# Altium PCB meteostancia_TX.PcbDoc
Units mm, origin at the board's own origin, x right, y up, seen from the top; angles counter-clockwise.
Board outline 44.5 x 32.75 mm, 2 copper layers (Top Layer, Bottom Side), stack 1.536 mm thick; 13 components, 11 nets, 67 pads, 0 vias.
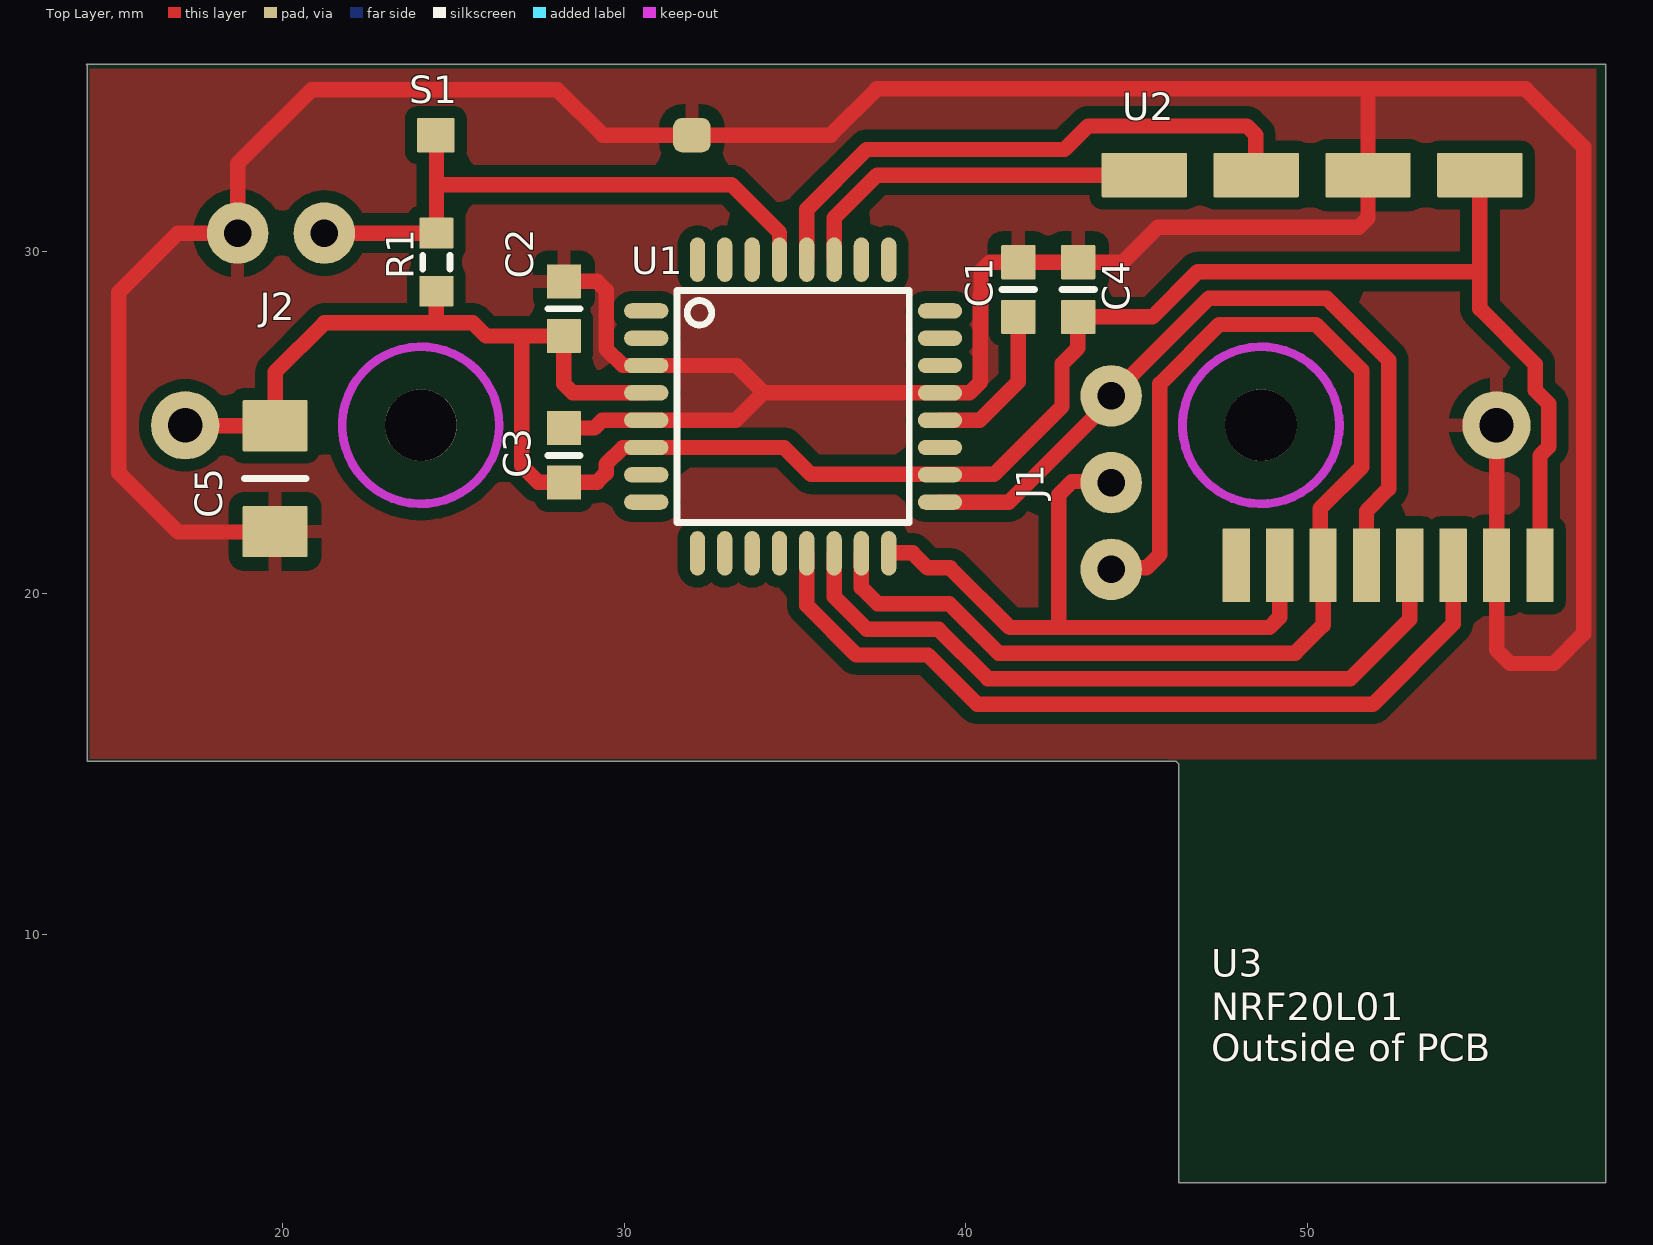
[diagram p0: Top Layer view]
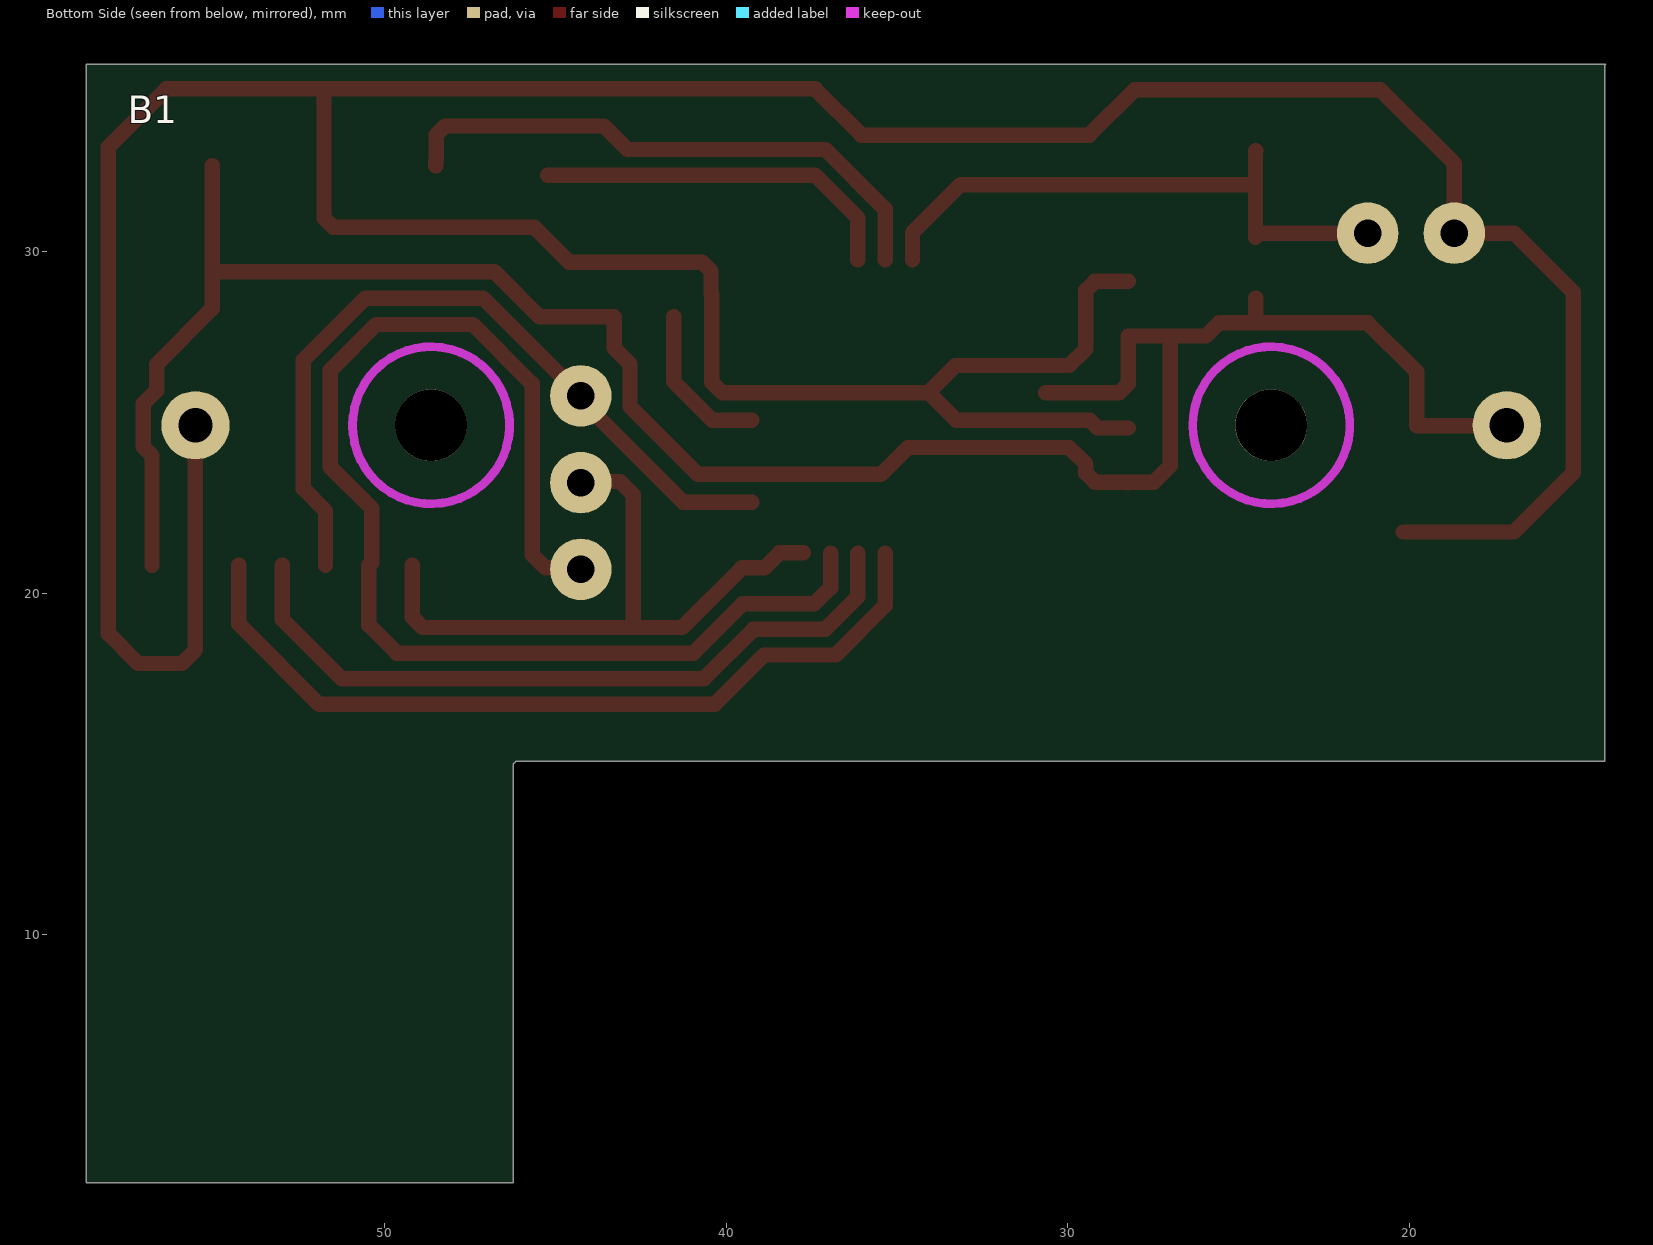
[diagram p1: Bottom Side view, seen from below]
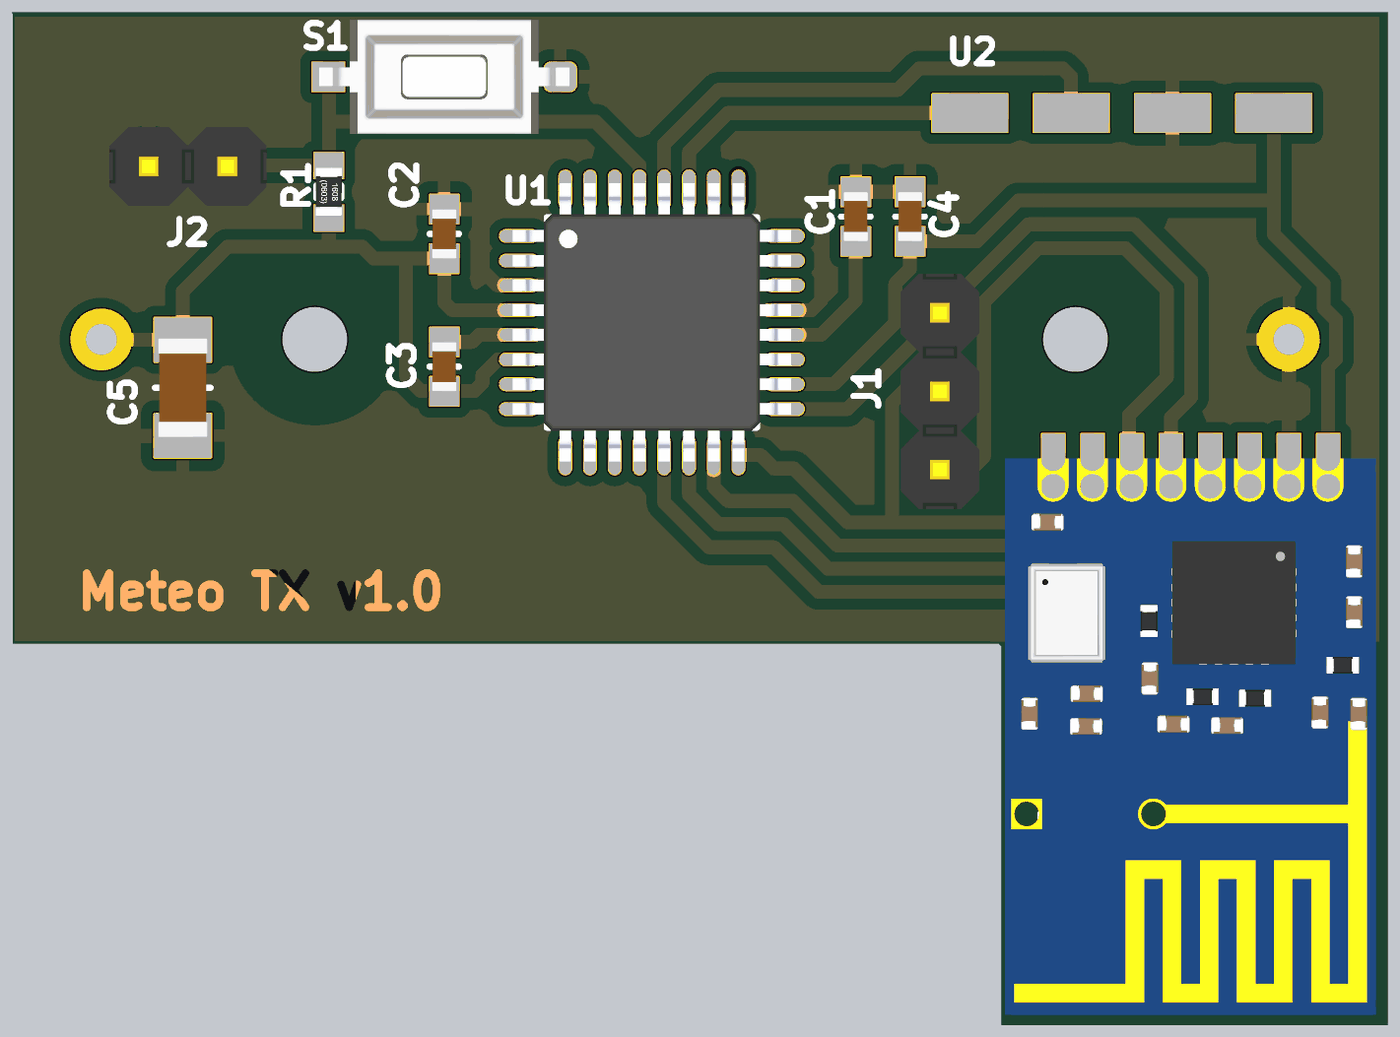
[diagram p2: 3D render of the assembled board from above, using the file's embedded part models]

## Layer stack, top to bottom
Top Solder: solder mask 0.0254, SM-003, Dk 4
Top Layer: signal copper 0.0356
Dielectric 1: dielectric 1.5, FR-4, Dk 4.8
Bottom Side: signal copper (thickness not stored)

## Board outline
14.285,15.09 14.285,35.465 14.25,35.5 58.75,35.5 58.75,2.75 46.25,2.75 46.25,15 46.16,15.09

## Design rules (kind name [scope] priority, off if disabled: settings)
AcuteAngle [All] p1 off: minimum=6.00000000000000E+0001 checktracksonly=FALSE
AssemblyTestPointUsage [All] p1 off:
AssemblyTestpoint [All] p1 off: testpointundercomponent=TRUE minsize=1.016 maxsize=2.54 preferedsize=1.524 minholesize=0 maxholesize=1.016 preferedholesize=0.813 testpointgrid=0.025 usegrid=TRUE gridtolerance=0 allowsidetop=TRUE allowsidebottom=TRUE
BoardOutlineClearance [All] p1: gap=0.25 ignorepadtopadclearanceinfootprint=FALSE // Отступ от края ПП при скрайбировании
Clearance "Opt Mounting Holes Clearance bottom" [IsPad and (Name = 'Free-OPT_MH') vs OnBottomLayer or OnMultiLayer] p1: gap=2 ignorepadtopadclearanceinfootprint=FALSE // Зазор крепежных отверстий
Clearance "Mounting Holes Clearance" [IsPad and (not PadIsPlated) and OnMultiLayer and not InAnyComponent and not (Name = 'Free-OPT_MH')] p2: gap=2.9 ignorepadtopadclearanceinfootprint=FALSE // Зазор крепежных отверстий
Clearance "Unplated pad Clearance" [IsPad and OnMultiLayer and (not PadIsPlated)] p3: gap=0.3 ignorepadtopadclearanceinfootprint=FALSE // Отступ меди от неметаллизированного отверстия
Clearance "Poly Clearance" [InNetClass('PWR') and not InAnyComponent] p4: gap=0.35 ignorepadtopadclearanceinfootprint=FALSE // Зазор полигон-всё по Резониту
Clearance "Class 4 Clearance" [All] p5: gap=0.3 ignorepadtopadclearanceinfootprint=FALSE except(0.35: Arc-Fill Arc-Poly Arc-Region Track-Fill Track-Poly Track-Region SMDPad-Fill SMDPad-Poly SMDPad-Region THPad-Fill THPad-Poly THPad-Region Via-Fill Via-Poly Via-Region Fill-Fill Fill-Poly Fill-Region Poly-Poly Poly-Region Region-Region) // Технологическое правило 4 класс точности ПП
ComponentClearance ComponentClearance_1 [All] p1: gap=0.254 collisioncheckmode=3 verticalgap=0.254 showdistances=FALSE
ComponentClearance ComponentClearance_141V [(ObjectKind = 'Component') And (Comment Like '141V*') vs (ObjectKind = 'Component') And (Comment Like '141V*')] p2: gap=-0.5 collisioncheckmode=3 verticalgap=0.254 showdistances=FALSE // Для разъемов 141V
ComponentClearance [InComponent('ISP1')] p3: gap=0.05 collisioncheckmode=3 verticalgap=0.1 showdistances=FALSE
ComponentOrientations [All] p1: allowedrotations=27
DiffPairsRouting [All] p1: maxlimit=0.15 minlimit=0.15 mostfreqgap=0.15 toplayer_minwidth=0.2 toplayer_maxwidth=0.2 toplayer_prefwidth=0.2 bottomlayer_minwidth=0.2 bottomlayer_maxwidth=0.2 bottomlayer_prefwidth=0.2 substack1={ABA373C2-5C5D-4988-96A0-18F648CA4271} toplayer_{aba373c2-5c5d-4988-96a0-18f648ca4271}_minwidth=0.381 toplayer_{aba373c2-5c5d-4988-96a0-18f648ca4271}_maxwidth=0.381 toplayer_{aba373c2-5c5d-4988-96a0-18f648ca4271}_prefwidth=0.381 bottomlayer_{aba373c2-5c5d-4988-96a0-18f648ca4271}_minwidth=0.381 bottomlayer_{aba373c2-5c5d-4988-96a0-18f648ca4271}_maxwidth=0.381 bottomlayer_{aba373c2-5c5d-4988-96a0-18f648ca4271}_prefwidth=0.381 maxuncoupledlength=15 // Диф. пары с суммарным расхождением штатного зазора 0.15 мм в пределах 10 мм
FabricationTestPointUsage [All] p1 off: valid=0 allowmultiple=FALSE
FabricationTestpoint [All] p1 off: side=3 testpointundercomponent=TRUE minsize=1.016 maxsize=2.54 preferedsize=1.524 minholesize=0 maxholesize=1.016 preferedholesize=0.813 testpointgrid=0.025 allowsidetop=TRUE allowsidebottom=TRUE usegrid=TRUE gridtolerance=0
Height [All] p1 off: minheight=0 maxheight=25.4 prefheight=12.7
HoleSize "Unplated HoleSize" [IsPad and OnMultiLayer and (not PadIsPlated)] p1: absolutevalues=TRUE maxlimit=10 minlimit=0.5 maxpercent=80.000 minpercent=20.000
HoleSize "Plated HoleSize" [IsVia or (IsPad and OnMultiLayer and PadIsPlated)] p2: absolutevalues=TRUE maxlimit=10 minlimit=0.3 maxpercent=80.000 minpercent=20.000 // Мин. диаметр металлизированного отверстия
HoleToHoleClearance [All] p1: gap=0.2 allowstackedmicrovias=TRUE
MinimumAnnularRing "MinimumAnnularRing Pad" [IsPad] p1: minimumring=0.2 // Мин. поясок КП
MinimumAnnularRing "MinimumAnnularRing Via" [IsVia] p2: minimumring=0.15 // Мин. поясок переходного отверстия
MinimumSolderMaskSliver [All] p1: minsoldermaskwidth=0.15 // Масочный мостик между КП
PasteMaskExpansion [All] p1: expansion=-0.025
PermittedLayers [All] p1: toplayerpermitted=TRUE bottomlayerpermitted=TRUE
PlaneClearance [All] p1: clearance=0.4
PlaneConnect Via_PlaneConnect [isvia] p1: planeconnectstyle=Direct reliefexpansion=0.508 reliefentries=4 reliefconductorwidth=0.254 reliefairgap=0.254
PlaneConnect [All] p2: planeconnectstyle=Relief reliefexpansion=0.2 reliefentries=4 reliefconductorwidth=0.45 reliefairgap=0.4
PolygonConnect "Direct PolygonConnect" [IsVia or InComponentClass('PowerPads')] p1: connectstyle=Direct reliefconductorwidth=0.254 reliefentries=4 polygonreliefangle="90 Angle" airgapwidth=0.254 // Подключение подлигонов к via напрямую
PolygonConnect [All] p2: connectstyle=Relief reliefconductorwidth=0.4 reliefentries=4 polygonreliefangle="90 Angle" airgapwidth=0.4 // Геометрия термобарьера
RoutingCorners [All] p1: cornerstyle=45-Degree minsetback=0.508 maxsetback=0.508
RoutingVias ComponentRoutingVias [IsComponentVia] p1: holewidth=0.3 width=0.6 viastyle="Through Hole" minholewidth=0.3 minwidth=0.6 maxholewidth=0.5 maxwidth=1
RoutingVias "Power RoutingVias" [InNetClass('PWR') and not InComponentClass('VIP')] p2: holewidth=0.5 width=0.8 viastyle="Through Hole" minholewidth=0.5 minwidth=0.8 maxholewidth=0.5 maxwidth=0.8 // Via силовых цепей
RoutingVias "Functional RoutingVias" [All] p3: holewidth=0.3 width=0.6 viastyle="Through Hole" minholewidth=0.3 minwidth=0.6 maxholewidth=0.3 maxwidth=0.6 // Via для не силовых цепей
RoutingVias "Technoligical RoutingVias" [All] p4: holewidth=0.6 width=0.3 viastyle="Through Hole" minholewidth=0.3 minwidth=0.6 maxholewidth=1.3 maxwidth=1 // Ограничение на Via по Резониту
SilkToSilkClearance [IsObjectKind('Text') vs IsObjectKind('Text')] p1: silktosilkclearance=0.15
SilkToSolderMaskClearance [IsPad] p1: minsilkscreentomaskgap=0.05 clearancetoexposedcopper=TRUE
SolderMaskExpansion "Via SolderMaskExpansion" [IsVia and not InAnyComponent] p1: expansion=0.102 istentingtop=TRUE // Закрыть via маской
SolderMaskExpansion "Technological SolderMaskExpansion" [All] p2: expansion=0.05 istentingtop=FALSE // Припуск паяльной маски по Резониту
SupplyNets "Schematic Supply Nets_3" [InNet('+3V')] p1: voltage=0.000
SupplyNets "Schematic Supply Nets" [InNet('GND')] p2: voltage=0.000
ViasUnderSMD ViasUnderSMD_VIP [HasFootprint('ESOP-8_N')] p1: allowed=TRUE
ViasUnderSMD [All] p2: allowed=FALSE
Width "Power Width" [InNetClass('PWR')] p1: maxlimit=5 minlimit=0.3 preferedwidth=0.5 substack1={ABA373C2-5C5D-4988-96A0-18F648CA4271} toplayer_{aba373c2-5c5d-4988-96a0-18f648ca4271}_maxwidth=0.6 toplayer_{aba373c2-5c5d-4988-96a0-18f648ca4271}_prefwidth=0.4 bottomlayer_{aba373c2-5c5d-4988-96a0-18f648ca4271}_maxwidth=0.6 bottomlayer_{aba373c2-5c5d-4988-96a0-18f648ca4271}_prefwidth=0.4 // Ширина проводников силовых цепей
Width "Single-ended 50 Ohm" [All] p2: maxlimit=0.6 minlimit=0.3 preferedwidth=0.35 substack1={ABA373C2-5C5D-4988-96A0-18F648CA4271} toplayer_{aba373c2-5c5d-4988-96a0-18f648ca4271}_minwidth=0.35 toplayer_{aba373c2-5c5d-4988-96a0-18f648ca4271}_prefwidth=0.45 bottomlayer_{aba373c2-5c5d-4988-96a0-18f648ca4271}_minwidth=0.254 bottomlayer_{aba373c2-5c5d-4988-96a0-18f648ca4271}_maxwidth=0.254 bottomlayer_{aba373c2-5c5d-4988-96a0-18f648ca4271}_prefwidth=0.254 minimp=50.000000 maximp=50.000000 favimp=50.000000 // Ширина проводников не силовых цепей
Width "Class 4 Width" [All] p3: maxlimit=10 minlimit=0.3 preferedwidth=0.35 substack1={ABA373C2-5C5D-4988-96A0-18F648CA4271} toplayer_{aba373c2-5c5d-4988-96a0-18f648ca4271}_minwidth=0.35 toplayer_{aba373c2-5c5d-4988-96a0-18f648ca4271}_maxwidth=0.6 toplayer_{aba373c2-5c5d-4988-96a0-18f648ca4271}_prefwidth=0.45 bottomlayer_{aba373c2-5c5d-4988-96a0-18f648ca4271}_minwidth=0.35 bottomlayer_{aba373c2-5c5d-4988-96a0-18f648ca4271}_maxwidth=0.6 bottomlayer_{aba373c2-5c5d-4988-96a0-18f648ca4271}_prefwidth=0.45 minimp=50.000000 maximp=50.000000 favimp=50.000000 // Минимальная ширина проводника по 4 классу точности ПП
14 further rules are at their usual default settings.

## Components (designator, comment, footprint, x,y, rotation, side; value= is the part's Value field where it differs from the comment)
B1 "Baterry" CR123A 58.35,34.175 r0 bottom
C1 "CAPC_0603" CAPC1608-0603N 41.546,28.9 r270 top value=100nF
C2 "CAPC_0603" CAPC1608-0603N 28.239,28.339 r270 top value=100nF
C3 "CAPC_0603" CAPC1608-0603N 28.239,24.045 r270 top value=100nF
C4 "CAPC_0603" CAPC1608-0603N 43.3,28.9 r270 top value=100nF
C5 "CAPC_1206" CAPC3216-1206M 19.784,23.362 r90 top value=10uF
J1 "AVR ISP Programmer" PLS-3 44.265,23.246 r180 top
J2 "VR ISP Programmer2" PLS-2 21.225,30.552 r270 top
R1 "RESC_0603_R" RESC1608-0603N 24.506,29.702 r270 top value=10k
S1 "Switch" "SWITCH ARDUINO" 28.239,33.42 r180 top
U1 "ATMEGA328P" ATMEGA328 34.951,25.475 r0 top
U2 "BME280" "Quad20 - duplicate" 50.149,32.25 r180 top
U3 "NRF20L01" NRF24L01 56.77,20.825 r270 top

## Footprints (in the part's own frame and the unit in brackets; to place one, negate y for a bottom-side part, rotate by r counter-clockwise, add the part's x,y. Pads: shape width x height; smd on the part's side, far side on the other; paste and mask are expansions set on the pad)
ATMEGA328 [mm]
  oval 1.3x0.45 smd: 1(-4.3,2.8) 2(-4.3,2) 3(-4.3,1.2) 4(-4.3,0.4) 5(-4.3,-0.4) 6(-4.3,-1.2) 7(-4.3,-2) 8(-4.3,-2.8) 17(4.3,-2.8) 18(4.3,-2) 19(4.3,-1.2) 20(4.3,-0.4) 21(4.3,0.4) 22(4.3,1.2) 23(4.3,2) 24(4.3,2.8)
  oval 0.45x1.3 smd: 9(-2.8,-4.3) 10(-2,-4.3) 11(-1.2,-4.3) 12(-0.4,-4.3) 13(0.4,-4.3) 14(1.2,-4.3) 15(2,-4.3) 16(2.8,-4.3) 26(2,4.3) 27(1.2,4.3) 28(0.4,4.3) 29(-0.4,4.3) 30(-1.2,4.3) 31(-2,4.3) 32(-2.8,4.3)
  oval 0.45x1.3 smd mask+0.102: 25(2.8,4.3)
  silkscreen extent -3.4,-3.4 3.4,3.4, body extent -4.5,-4.5 4.5,4.5, height 1.2
CAPC1608-0603N [mm] "Chip Capacitor, Body 1.6x0.8mm, IPC Medium Density"
  rrect5% 1x1 smd: 1(-0.8,0) 2(0.8,0)
  silkscreen extent 0,-0.48 0,0.48, body extent -0.8,-0.4 0.8,0.4, height 0.6
CAPC3216-1206M [mm] "Chip Capacitor, Body 3.2x1.6mm, IPC Low Density"
  rrect5% 1.5x1.9 smd: 1(-1.55,0) 2(1.55,0)
  silkscreen extent 0,-0.9 0,0.9, body extent -1.6,-0.8 1.6,0.8, height 1.25
CR123A [mm]
  round 2 hole 1: 1(-41.2,9.25) 2(-2.8,9.25)
  round 2.1 hole 2.1 unplated: 3(-34.3,9.25) 3(-9.7,9.25)
NRF24L01 [mm]
  rrect5% 2.159x0.8 smd: 1(0,0.05) 2(0,-1.22) 3(0,-2.49) 4(0,-3.76) 5(0,-5.03) 6(0,-6.3) 7(0,-7.57) 8(0,-8.84)
  body extent -0.25,-10.4 17.75,1.6, height 1.87
PLS-2 [mm] "Штыри однорядные 1x2 конт. шаг 2.54 мм, вертик. на плату"
  round 1.8 hole 0.8: 1(0,0) 2(0,-2.54)
  body extent -1.24,-3.81 1.3,1.27, height 8.7
PLS-3 [mm] "Штыри однорядные 1x4 конт. шаг 2.54 мм, вертик. на плату"
  round 1.8 hole 0.8: 1(0,2.54) 2(0,0) 3(0,-2.54)
  body extent -1.27,-3.81 1.27,3.81, height 8.7
"Quad20 - duplicate" [mm]
  rrect5% 2.5x1.3 smd: 1(-4.912,0) 2(-1.637,0) 3(1.637,0) 4(4.913,0)
RESC1608-0603N [mm] "Chip Resistor, Body 1.6x0.8mm, IPC Medium Density"
  rrect5% 0.9x1 smd: 1(-0.85,0) 2(0.85,0)
  silkscreen extent -0.2,-0.4 0.2,0.4, body extent -0.77,-0.42 0.78,0.43, height 0.45
"SWITCH ARDUINO" [mm]
  rrect50% 1.1x1 smd: 1(-3.75,0)
  rrect5% 1.1x1 smd: 2(3.75,0)
  body extent -4.05,-1.85 4.05,1.85, height 2.5

## Part data
C1 C2 C3 C4: "Capacitor 0603"
C5: "Capacitor 1206"
J2: library part "AVR ISP Programmer2"
R1: "Resistor 0603"
S1: Package=None, Availability=Unavailable, MP=TL1105AF160Q, Price=None
U1: "AVR AVRÂ® ATmega Microcontroller IC 8-Bit 20MHz 32KB (16K x 16) FLASH 32-TQFP (7x7)", Package="TQFP-32 Microchip Technology / Atmel", Check_prices=https://www.snapeda.com/parts/ATMEGA328P-AN/Microchip/view-part/?ref=eda, MF="Microchip Technology / Atmel", MP=ATMEGA328P-AN, SnapEDA_Link=https://www.snapeda.com/parts/ATMEGA328P-AN/Microchip/view-part/?ref=snap

## Nets (pads, with @x,y where several pads share a name; then routed paths per layer and width w, separated by ;. In a path a pad name is that pad's centre, name@x,y a point inside that pad or via, vN(x,y) a via of type N, cw(c..) or ccw(c..) an arc to the next point about the centre after c; other vN are vias at no path point)
+3V: B1.1 C2.2 C3.2 C4.2 C5.2 R1.2 U1.4 U1.6 U1.18 U2.1 U3.1 | length 67.4
  Top Layer w0.45: B1.1 17.163,24.912 C5.2 19.784,26.484 21.225,27.925 24.506,27.925 ; R1.2@24.506,28.65 24.506,27.925 ; U1.4 28.503,25.875 28.239,26.139 C2.2 27.002,27.539 ; U2.1@55.061,32.522 55.061,29.425 ; U3.1 56.82,24.038 57.075,24.293 57.075,25.557 56.679,25.953 56.679,26.721 55.061,28.339 55.061,29.425 ; 24.506,27.925 25.575,27.925 25.96,27.539 27.002,27.539 ; 27.002,27.539 27.002,23.741 27.489,23.254 28.23,23.254 C3.2 28.253,23.259 29.213,23.259 29.476,23.523 29.476,23.786 29.965,24.275 U1.6 34.691,24.275 35.478,23.488 40.835,23.488 42.825,25.477 42.825,26.725 43.289,27.189 43.289,28.089 C4.2 45.475,28.1 46.8,29.425 55.061,29.425
GND: B1.2 C1.1 C2.1 C3.1 C4.1 C5.1 J2.2 S1.1 U1.3 U1.5 U1.21 U2.2 U3.2 | length 123.2
  Top Layer w0.45: C5.1@20.179,21.8 16.94,21.8 15.2,23.54 15.2,28.82 16.927,30.548 18.68,30.548 J2.2 18.685,32.585 20.85,34.75 28.05,34.75 29.38,33.42 S1.1 36.05,33.42 37.405,34.775 51.786,34.775 ; C3.1 29.135,24.845 29.365,25.075 U1.5 33.275,25.075 34.075,25.875 ; C2.1 29.213,29.139 29.476,28.876 29.476,27.164 29.965,26.675 U1.3 33.3,26.675 34.088,25.888 34.075,25.875 ; B1.2 U3.2 55.55,18.35 55.95,17.95 57.225,17.95 58.1,18.825 58.1,33.075 56.4,34.775 51.786,34.775 ; 34.075,25.875 U1.21 40.117,25.875 40.426,26.184 40.426,28.763 40.451,28.788 40.451,29.436 40.715,29.7 C1.1 C4.1 44.608,29.7 45.633,30.725 51.523,30.725 51.786,30.989 U2.2 51.786,34.775
MISO: J1.2 U1.16 U3.7 | length 19.7
  Top Layer w0.45: U1.16@37.751,21.188 38.452,21.188 38.89,20.75 39.55,20.75 41.295,19.005 42.725,19.005 ; J1.2@44.425,23.29 44.414,23.279 43.114,23.279 42.725,22.89 42.725,19.005 ; U3.7 49.2,19.304 48.901,19.005 42.725,19.005
MOSI: J1.1 U1.15 U3.6 | length 37.4
  Top Layer w0.45: U1.15 36.951,20.17 37.421,19.7 39.521,19.7 40.966,18.255 49.654,18.255 50.47,19.071 U3.6 50.386,20.909 50.386,22.486 51.602,23.702 51.602,26.534 50.259,27.877 47.427,27.877 45.69,26.14 45.69,21.14 45.3,20.75 44.307,20.75 J1.1@44.265,20.708
NetC1_2: C1.2 U1.20 | length 4.7
  Top Layer w0.45: U1.20 40.42,25.075 41.546,26.201 C1.2
NetJ2_1: J2.1 R1.1 S1.2 U1.29 | length 17.2
  Top Layer w0.45: J2.1 R1.1 ; S1.2@24.506,32.962 24.511,32.957 24.511,31.971 ; R1.1@24.511,30.425 24.511,31.971 ; U1.29 34.551,30.564 33.144,31.971 24.511,31.971
NetU1_13: U1.13 U3.3 | length 24.3
  Top Layer w0.45: U1.13 35.351,19.649 36.8,18.2 38.9,18.2 40.345,16.755 51.928,16.755 54.28,19.107 U3.3
NetU1_14: U1.14 U3.4 | length 21.4
  Top Layer w0.45: U1.14 36.151,19.91 37.111,18.95 39.211,18.95 40.656,17.505 51.269,17.505 53.006,19.242 53.006,20.821 U3.4
SCK: J1.3 U1.17 U3.5 | length 22.9
  Top Layer w0.45: U1.17 41.27,22.675 J1.3@44.446,25.851 ; J1.3 47.128,28.649 50.576,28.649 52.392,26.833 52.392,23.067 51.74,22.415 U3.5
SCL: U1.28 U2.3 | length 16.7
  Top Layer w0.45: U1.28 35.351,30.2 35.351,31.251 37.1,33 42.9,33 43.59,33.69 48.236,33.69 48.5,33.427 48.5,32.675 48.511,32.664 U2.3@48.511,32.522
SDA: U1.27 U2.4 | length 10.8
  Top Layer w0.45: U1.27 36.151,30.99 37.411,32.25 U2.4
pads on no net: B1.3 U1.1 U1.2 U1.7 U1.8 U1.9 U1.10 U1.11 U1.12 U1.19 U1.22 U1.23 U1.24 U1.25 U1.26 U1.30 U1.31 U1.32 U3.8

## Polygon pours and split planes (outlines as drawn)
GND on Top Layer "GND_L01_P001" (solid, remove dead copper, pour order 1): 14.3,35.4 58.725,35.4 58.725,15.15 14.3,15.15

## Keep-outs
Keep-Out Layer:
  circle w0.254: c24.05,24.925 r2.3
  circle w0.254: c48.65,24.925 r2.3

## Silkscreen, mask and mechanical layers (free items; w line width, h text height)
Top Solder:
  text "Meteo TX v1.0" at 16.25,16.25 h1.1
Mechanical 1:
  the board outline again, w0.1

## Text inside footprints (layer, text, board x,y; h text height)
U3: Top Overlay "Outside of PCB" at 47.2,6.3 h0.8